# Altium PCB UCAGPS.PcbDoc
Units mm, origin at the board's own origin, x right, y up, seen from the top; angles counter-clockwise.
Board outline 70.48 x 60.32 mm, 2 copper layers (Top Layer, Bottom Layer); 6 components, 8 nets, 21 pads, 0 vias.
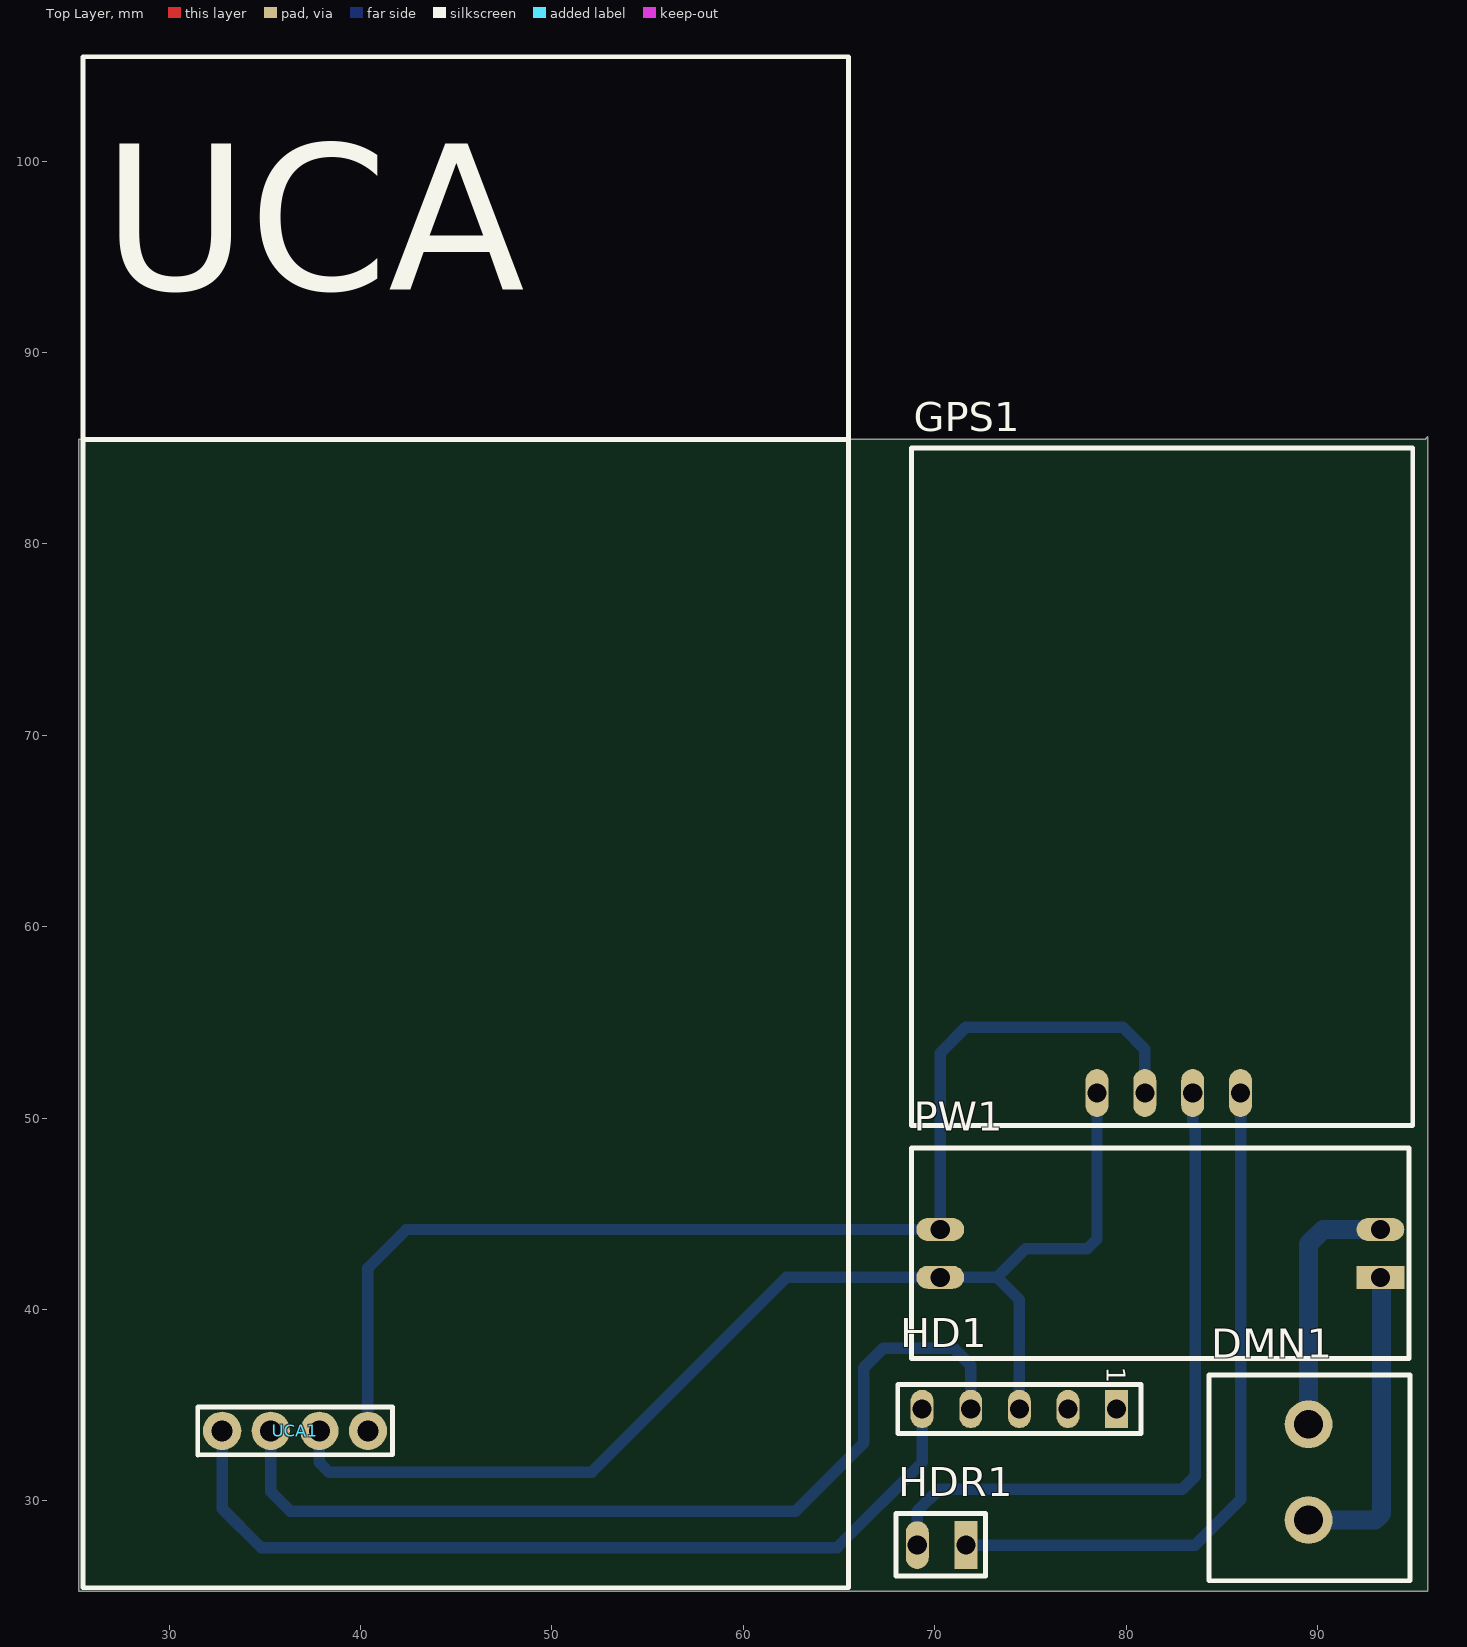
[diagram p0: Top Layer view]
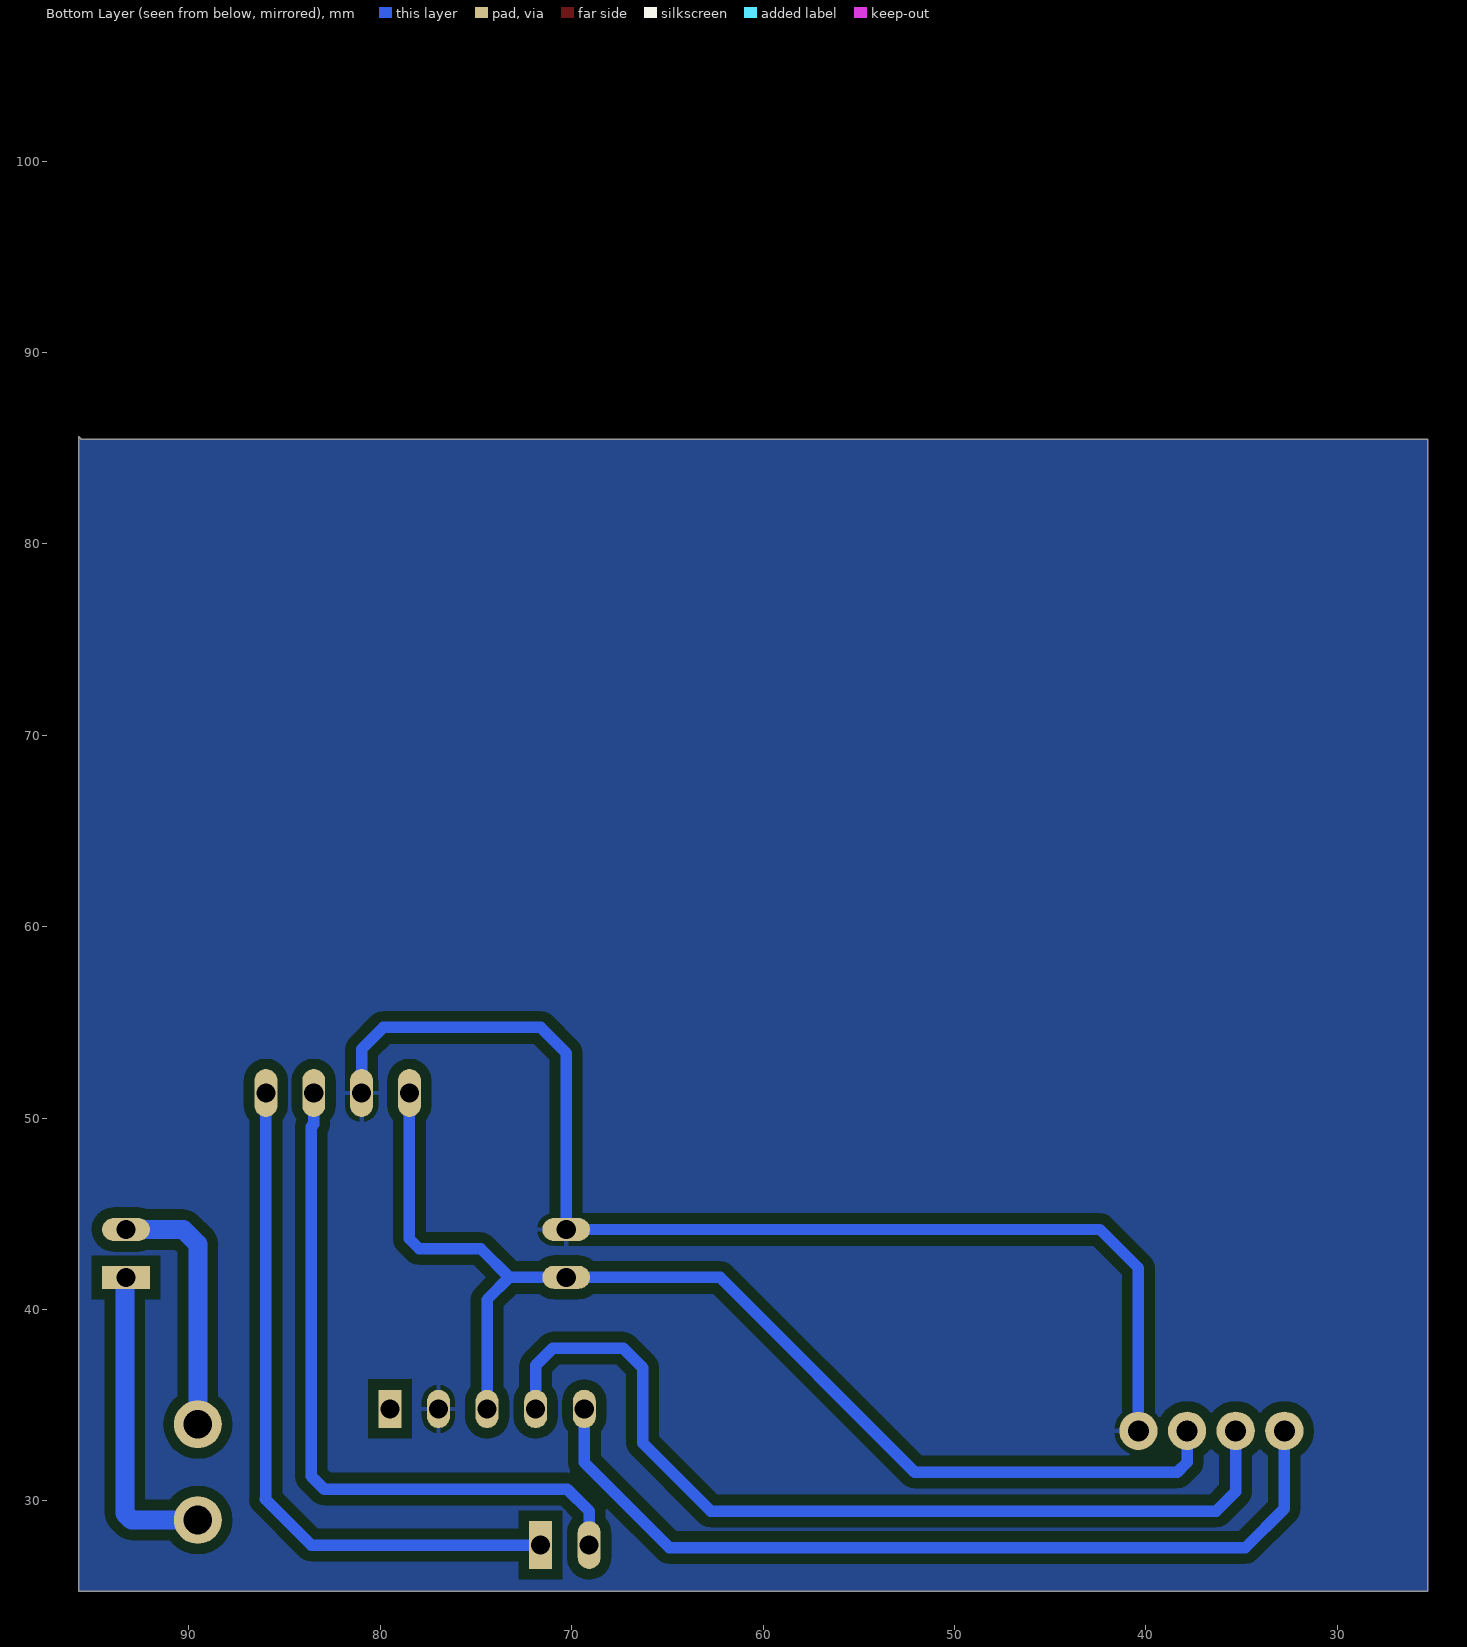
[diagram p1: Bottom Layer view, seen from below]
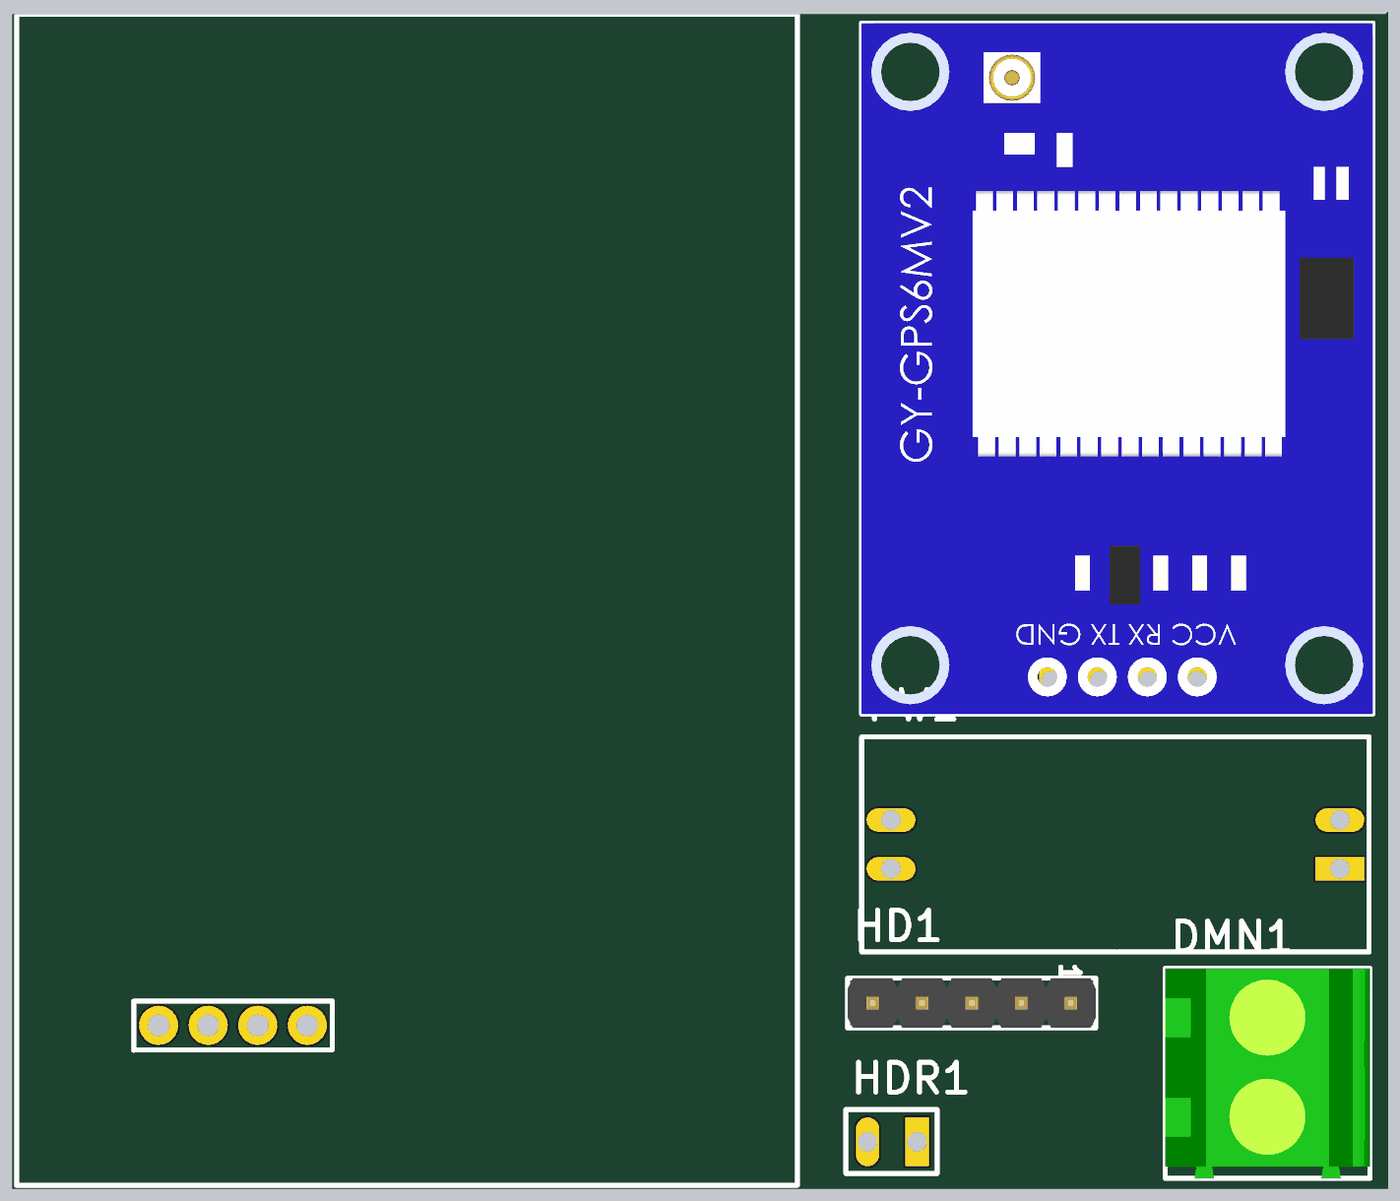
[diagram p2: 3D render of the assembled board from above, using the file's embedded part models]

## Layer stack, top to bottom
Top Solder: solder mask 0.0102, Solder Resist, Dk 3.5
Top Layer: signal copper 0.0356
Dielectric 1: dielectric 0.32, FR-4, Dk 4.8
Bottom Layer: signal copper 0.0356
Bottom Solder: solder mask 0.0102, Solder Resist, Dk 3.5

## Board outline
25.273,25.273 95.758,25.273 95.758,85.598 95.631,85.471 25.273,85.471

## Design rules (kind name [scope] priority, off if disabled: settings)
Clearance "Copper Pour" [InPolygon] p1: gap=0.54 ignorepadtopadclearanceinfootprint=FALSE
Clearance [All] p2: gap=0.254 ignorepadtopadclearanceinfootprint=FALSE except(0: Arc-Hole Track-Hole SMDPad-Hole THPad-Hole Via-Hole Fill-Hole Poly-Hole Region-Hole Text-Hole)
PolygonConnect [All] p1: connectstyle=Relief reliefconductorwidth=0.254 reliefentries=4 polygonreliefangle="90 Angle" airgapwidth=0.254
RoutingVias [All] p1: holewidth=0.711 width=1.27 viastyle="Through Hole" minholewidth=0.711 minwidth=1.27 maxholewidth=0.711 maxwidth=1.27
SolderMaskExpansion [All] p1: expansion=0.102
Width [All] p1: maxlimit=0.254 minlimit=0.254 preferedwidth=0.254
30 further rules are at their usual default settings.

## Components (designator, comment, footprint, x,y, rotation, side; value= is the part's Value field where it differs from the comment)
DMN1 "Domino2Pin" CONN-SIL2 89.535,31.496 r0 top
GPS1 "GPSNeoM6" GPSNEOM6 78.479,51.308 r90 top
HD1 "61300511121" HEADER 79.502,34.798 r270 top
HDR1 "961102-6404-AR" header2pin 71.628,27.686 r270 top
PW1 "PowerConvert5To3v3" PowerConvert5To3v3 81.788,42.926 r180 top
UCA1 "UCABoard" UCABOARD 32.766,33.655 r0 top

## Footprints (in the part's own frame and the unit in brackets; to place one, negate y for a bottom-side part, rotate by r counter-clockwise, add the part's x,y. Pads: shape width x height; smd on the part's side, far side on the other; paste and mask are expansions set on the pad)
CONN-SIL2 [mm]
  round 2.5 hole 1.5: 1(0,2.5) 2(0,-2.5)
  silkscreen extent -5.2,-5.68 5.3,5.08, body extent -5.2,-5.68 5.3,5.08, height 15.85
GPSNEOM6 [mm]
  oval 2.5x1.2 hole 1: 1(0,0) 2(0,-2.5) 3(0,-5) 4(0,-7.5)
  silkscreen extent -1.7,-16.5 33.7,9.7, body extent -1.7,-16.5 33.7,9.7, height 4.7
HEADER [mm]
  rect 2x1.2 hole 1: 1(0,0)
  oval 2x1.2 hole 1: 2(0,-2.54) 3(0,-5.08) 4(0,-7.62) 5(0,-10.16)
  silkscreen extent -1.28,-11.44 1.28,1.28, body extent -1.27,-11.43 1.27,1.27, height 8.87
header2pin [mm]
  rect 2.5x1.2 hole 1: 1(0,0)
  oval 2.5x1.2 hole 1: 2(0,-2.54)
  silkscreen extent -1.65,-3.65 1.63,1.02
PowerConvert5To3v3 [mm]
  rect 2.5x1.2 hole 1: 1(-11.5,1.25)
  oval 2.5x1.2 hole 1: 2(-11.5,-1.25) 3(11.5,-1.25) 4(11.5,1.25)
  silkscreen extent -13,-5.5 13,5.5, body extent -13,-5.5 13,5.5, height 2
UCABOARD [mm] "lora antena"
  round 2 hole 1.1: 1(0,0) 2(2.54,0) 3(5.08,0) 4(7.62,0)
  silkscreen extent -7.27,-8.2 32.73,71.8, body extent -17.27,-8.2 32.73,51.8, height 1.27

## Part data
HD1: "WURTH ELEKTRONIK         61300511121            Board-To-Board Connector, Vertical, WR-PHD Series, Through Hole, Header, 5 Contacts, 2.54 mm", Color=Black, Manufacturer="Wurth Electronics", Supplier Part Number 1=732-5318-ND, ComponentLink1Description=https://katalog.we-online.de/em/datasheet/6130xx11121.pdf?src-supplier=Digi-Key, ComponentLink1URL=https://katalog.we-online.de/em/datasheet/6130xx11121.pdf?src-supplier=Digi-Key, ComponentLink2Description=http://www.farnell.com/cad/1737268.pdf?src-supplier=Element14, ComponentLink2URL=http://www.farnell.com/cad/1737268.pdf?src-supplier=Element14, Connector Type="Male Pin", Contact Material=Copper, Contact Mating Length=0.236inch, Contact Plating=Gold, Gender=Male, Lead Free="Lead Free", Manufacturer Part Number=61300511121, Mount="Through Hole", Number of Contacts=5, Number of Positions=5, Number of Rows=1, Packaging=Bulk, Pitch=0.1inch, Pricing 1="1 = 0.25000, 10 = 0.20900, 25 = 0.17400, 50 = 0.14500, 100 = 0.13200, 1000 = 0.12000 (USD)", REACH SVHC=Unknown, RoHS=Yes, Stock 1=24299, Supplier 1=Digi-Key, Termination=Solder
HDR1: "CONN HEADER VERT SGL 2POS GOLD", Color=Black, Current Rating=2A, Manufacturer=3M, Max Operating Temperature=105°C, Min Operating Temperature=-25°C, Package Quantity=3000, Supplier Part Number 1=3M9457-02-ND, ComponentLink1Description=https://datasheet.ciiva.com/14617/70237733-14617125.pdf?src-supplier=Allied+Electronics, ComponentLink1URL=https://datasheet.ciiva.com/14617/70237733-14617125.pdf?src-supplier=Allied+Electronics, ComponentLink2Description=https://datasheet.ciiva.com/731/ts2181-731431.pdf?src-supplier=Digi-Key, ComponentLink2URL=https://datasheet.ciiva.com/731/ts2181-731431.pdf?src-supplier=Digi-Key, ComponentLink3Description=https://datasheet.ciiva.com/7997/ts2181-7997272.pdf?src-supplier=Element14, ComponentLink3URL=https://datasheet.ciiva.com/7997/ts2181-7997272.pdf?src-supplier=Element14, ComponentLink4Description=https://datasheet.ciiva.com/5724/ts2181-5724889.pdf?src-supplier=Farnell, ComponentLink4URL=https://datasheet.ciiva.com/5724/ts2181-5724889.pdf?src-supplier=Farnell, ComponentLink5Description=https://datasheet.ciiva.com/46428/1794052-46428554.pdf?src-supplier=Element14, ComponentLink5URL=https://datasheet.ciiva.com/46428/1794052-46428554.pdf?src-supplier=Element14, Connector Type="Male Pin", Contact Gender=Male, Contact Material="Copper Alloy,Copper", Contact Mating Length=0.22inch, Contact Plating=Gold, Contact Post Length=3.3mm, Depth=2.5mm, Gender=Male, Housing Color=Black, Housing Material=Thermoplastic, Length=5.08mm, Manufacturer Part Number=961102-6404-AR, Max Current Rating=2A, Mount="Through Hole", Number of Contacts=2, Number of Positions=2, Number of Rows=1, Orientation=Straight, Packaging=Bulk, Pitch=2.54mm, Pricing 1="1 = 0.22000, 10 = 0.21000, 25 = 0.17920, 50 = 0.15680, 100 = 0.14560, 250 = 0.12880, 500 = 0.12320 (USD)", REACH SVHC=Unknown, RoHS=Yes, Stock 1=58970, Supplier 1=Digi-Key, Termination=Solder
PW1: "Convert 5 to 3.3"

## Nets (pads, with @x,y where several pads share a name; then routed paths per layer and width w, separated by ;. In a path a pad name is that pad's centre, name@x,y a point inside that pad or via, vN(x,y) a via of type N, cw(c..) or ccw(c..) an arc to the next point about the centre after c; other vN are vias at no path point)
+3.3: GPS1.1 HD1.3 PW1.4 UCA1.3 | length 62.5
  Bottom Layer w0.6: UCA1.3 37.846,32.004 38.354,31.496 52.07,31.496 62.25,41.676 PW1.4 73.259,41.676 ; HD1.3 74.422,40.513 73.259,41.676 ; GPS1.1 78.479,43.681 77.978,43.18 74.763,43.18 73.259,41.676
GND: GPS1.2 HD1.2 PW1.3 UCA1.4 | length 62.5
  Bottom Layer w0.6: UCA1.4 40.386,42.164 42.398,44.176 PW1.3 70.288,53.397 71.628,54.737 79.836,54.737 80.979,53.594 GPS1.2
NetDMN1_1: DMN1.1 PW1.2 | length 13.5
  Bottom Layer w1: DMN1.1 89.535,43.414 90.297,44.176 PW1.2
NetDMN1_2: DMN1.2 PW1.1 | length 16.3
  Bottom Layer w1: DMN1.2 93.004,28.996 93.345,29.337 93.345,41.619 PW1.1
NetGPS1_3: GPS1.3 HDR1.2 | length 37.1
  Bottom Layer w0.6: HDR1.2 69.088,29.464 70.231,30.607 82.931,30.607 83.608,31.284 83.608,49.548 83.479,49.677 GPS1.3
NetGPS1_4: GPS1.4 HDR1.1 | length 36.6
  Bottom Layer w0.6: HDR1.1 83.61,27.686 86.001,30.077 85.979,30.099 GPS1.4
NetHD1_4: HD1.4 UCA1.2 | length 48.7
  Bottom Layer w0.6: UCA1.2 35.306,30.48 36.322,29.464 62.738,29.464 66.294,33.02 66.294,36.957 67.31,37.973 70.993,37.973 71.882,37.084 HD1.4
NetHD1_5: HD1.5 UCA1.1 | length 46.1
  Bottom Layer w0.6: UCA1.1 32.766,29.591 34.798,27.559 64.897,27.559 69.342,32.004 HD1.5
pads on no net: HD1.1

## Polygon pours and split planes (outlines as drawn)
GND on Bottom Layer (solid, pour order 4): 25.273,25.273 95.758,25.273 95.758,85.598 95.631,85.471 25.273,85.471

## Silkscreen, mask and mechanical layers (free items; w line width, h text height)
Bottom Paste:
  lines w0.254: 25.273,25.273 25.273,85.471 95.758,85.471 95.758,25.273 25.273,25.273

## Text inside footprints (layer, text, board x,y; h text height)
HD1: Top Overlay "1" at 78.977,36.998 h1 r270
UCA1: Top Overlay "UCA" at 26.491,89.455 h20